# Altium PCB PCB1.PcbDoc (part 3 of 3)
Units mm, origin at the board's own origin, x right, y up, seen from the top; angles counter-clockwise.
Board outline 150.95 x 92.76 mm, 4 copper layers (Top Layer, GND, VCC, Bottom Layer); 250 components, 258 nets, 1099 pads, 538 vias.
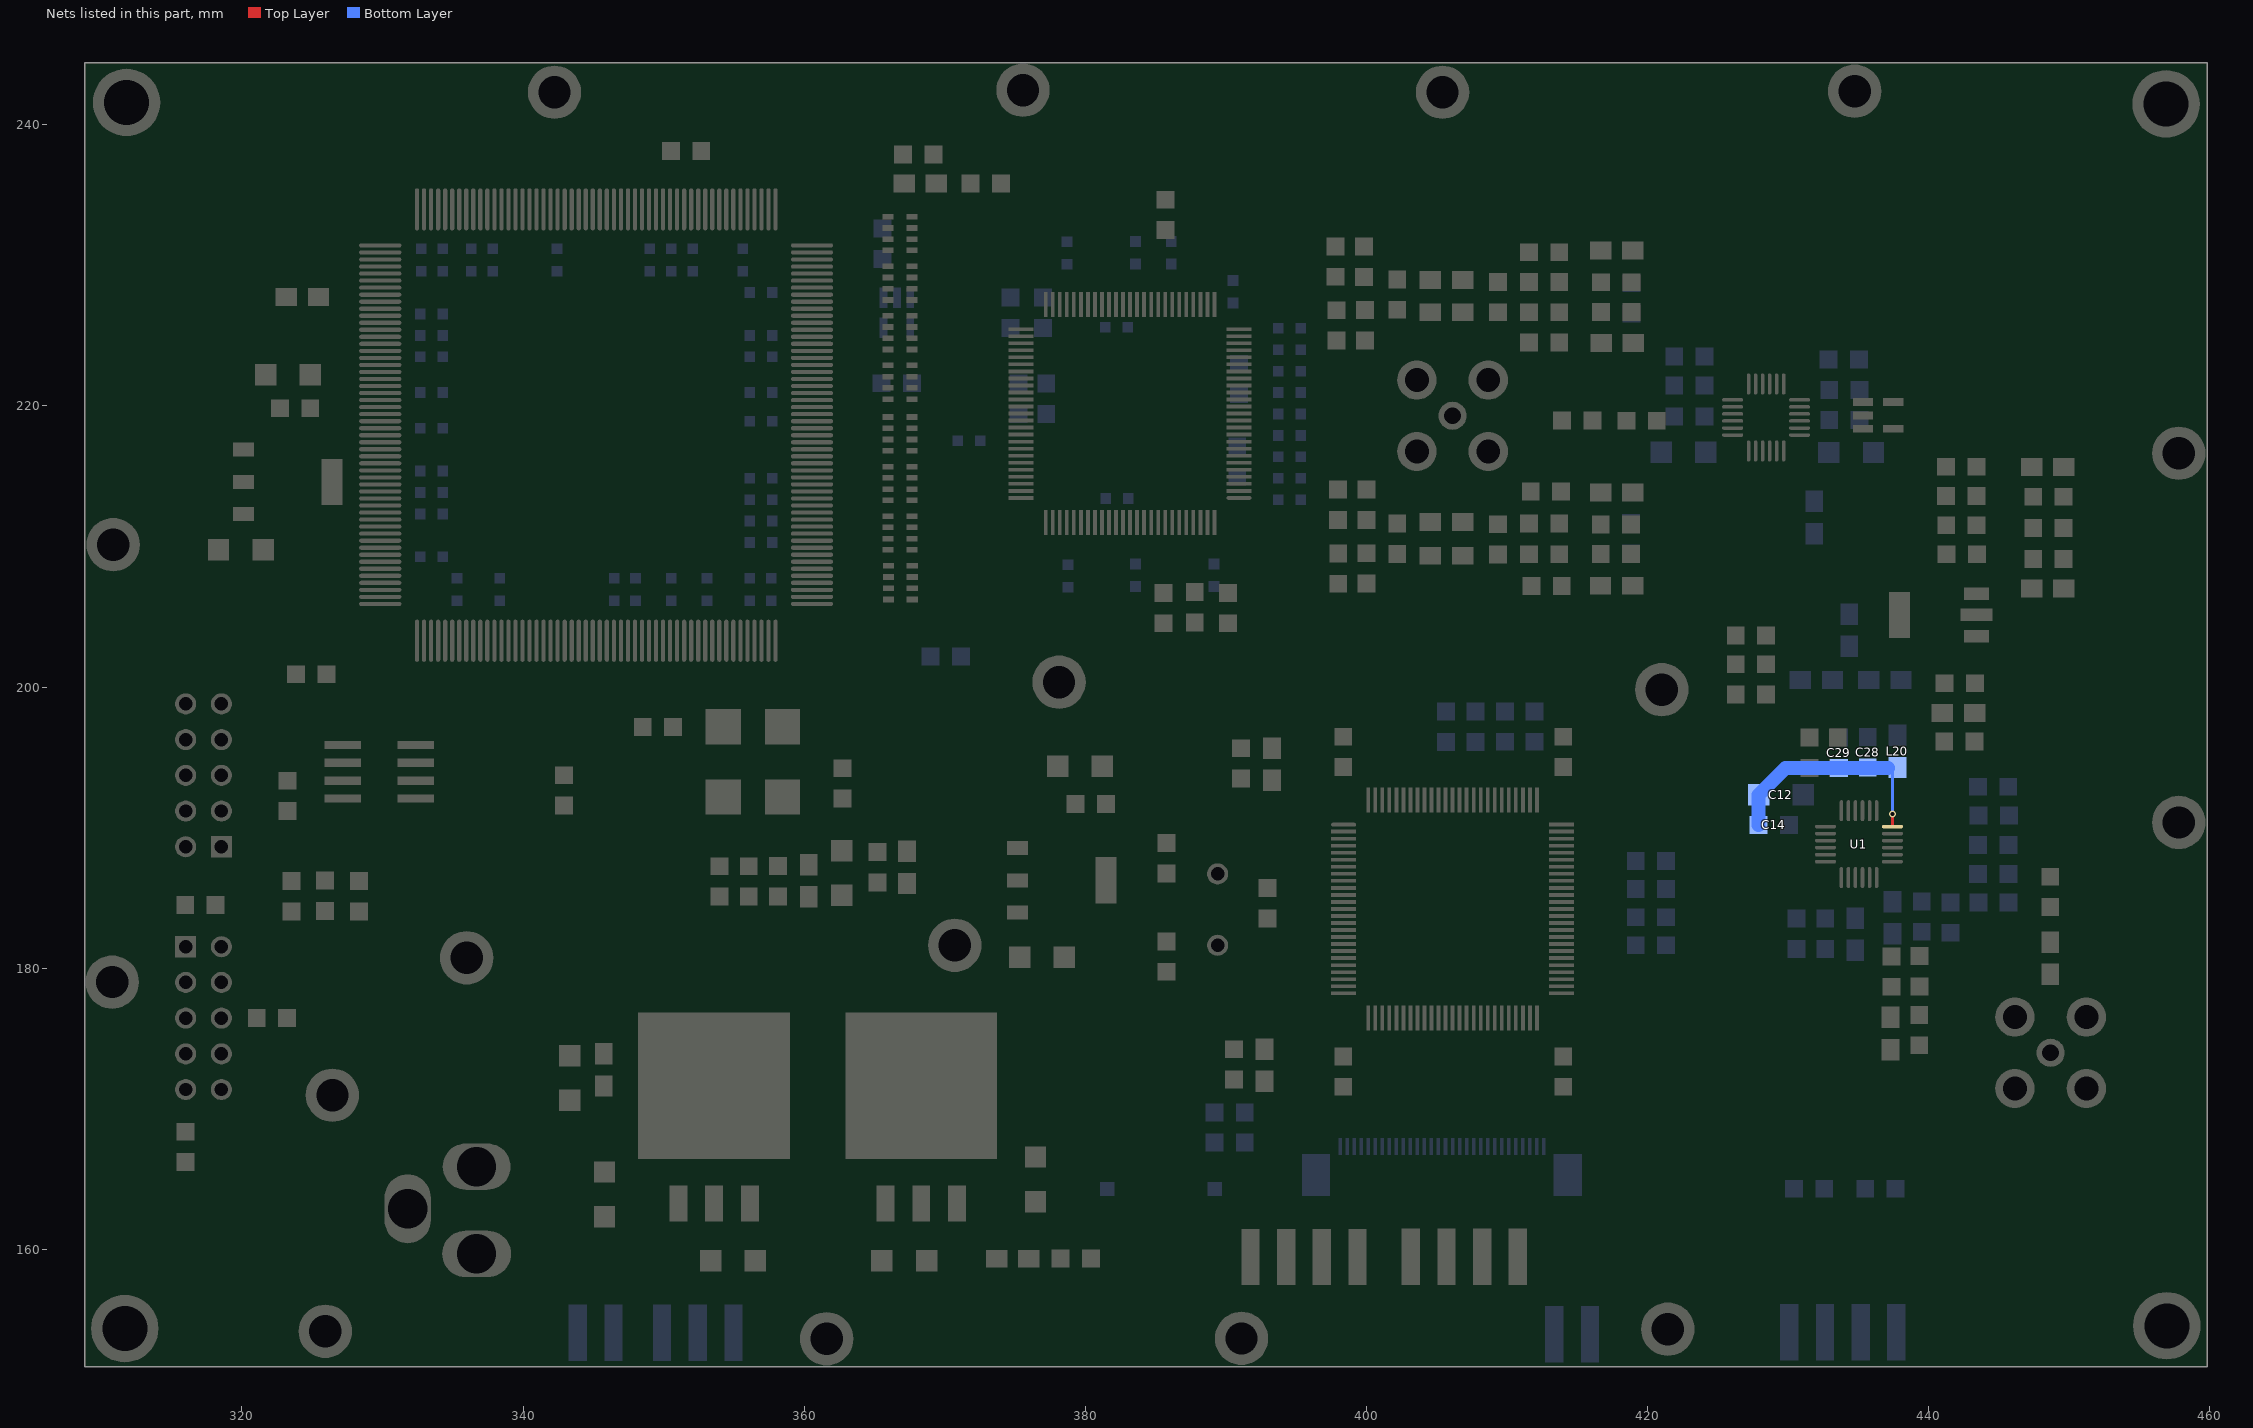
[diagram p5: the nets of this part, all layers, seen from the top]

## Via types
v1: diameter 0.5, hole 0.3, Top Layer to Bottom Layer, 224 vias
v2: diameter 1, hole 0.5, Top Layer to Bottom Layer, 206 vias
v3: diameter 0.508, hole 0.254, Top Layer to Bottom Layer, 97 vias
v4: diameter 0.5, hole 0.3, Top Layer to Bottom Layer, tented both sides, 7 vias
v5: diameter 2, hole 1, Top Layer to Bottom Layer, 4 vias

## Nets (pads, with @x,y where several pads share a name; then routed paths per layer and width w, separated by ;. In a path a pad name is that pad's centre, name@x,y a point inside that pad or via, vN(x,y) a via of type N, cw(c..) or ccw(c..) an arc to the next point about the centre after c; other vN are vias at no path point) (continued)
VVCO3_3_4360: C12.1 C14.1 C28.1 C29.1 L20.2 U1.6 | length 16.4
  Top Layer w0.203: U1.6@437.413,190.079 v1(437.413,190.983)
  Bottom Layer w0.203: 437.083,194.259 437.413,193.929 v1(437.413,190.983)
  Bottom Layer w1: C14.1@427.888,190.195 C12.1@427.888,192.329 429.819,194.259 C29.1@433.603,194.259 437.083,194.259
pads on no net: LL1.2 LL2.2 P2.6 P2.7 P2.8 P3.2 P10.0 U2.1 U2.6 U2.7 U2.13 U2.15 U4.3 U4.4 U4.5 U4.6 U4.8 U4.10 U4.11 U4.12 U4.14 U4.15 U4.24 U4.27 U4.30 U4.31 U4.33 U4.34 U4.35 U4.39 U4.40 U4.41 U4.43 U4.44 U4.45 U4.46 U4.48 U4.56 U4.81 U4.116 U4.118 U4.127 U4.128 U4.129 U4.130 U4.131 U4.132 U4.133 U4.134 U4.135 U4.137 U4.138 U4.139 U4.141 U4.142 U4.143 U4.144 U4.146 U4.147 U4.149 U4.150 U4.152 U4.160 U4.161 U4.162 U4.163 U4.164 U4.165 U4.168 U4.169 U4.171 U4.173 U4.175 U4.176 U4.179 U4.180 U4.181 U4.182 U4.185 U4.187 U4.188 U4.189 U4.191 U4.193 U4.195 U4.197 U4.198 U4.199 U4.200 U4.201 U4.203 U4.205 U4.206 U4.207 U4.208 U5.59 U5.60 U5.66 U5.94 U5.96 U7.73

## Polygon pours and split planes (outlines as drawn)
GND on Bottom Layer "Bottom Layer-No Net" (solid, remove dead copper, pour order 2): 333.426,230.556 356.972,230.556 356.972,206.781 356.921,206.731 333.477,206.731
GND on GND (split plane): 459.28,152.148 309.349,152.148 309.349,243.888 459.28,243.888

## Keep-outs
Keep-Out Layer:
  the board outline again, w0.508

## Other copper
Top Layer:
  rectangle net GND: 436.474,202.743 440.182,207.416
  rectangle net GND: 419.596,151.638 423.596,202.286
  rectangle net GND: 324.016,151.689 328.016,171.755
  region net GND: 326.819,169.015 337.931,180.128 335.102,182.956 323.99,171.843
  rectangle net GND: 308.839,151.638 312.839,244.399
  rectangle net GND: 455.791,151.638 459.791,244.399
  rectangle net GND: 369.367,198.311 423.52,202.311
  rectangle net GND: 335.026,178.931 373.253,182.931
  rectangle net GND: 369.278,178.918 373.278,202.286
  rectangle net GND: 308.839,151.638 459.791,155.638
  rectangle net GND: 308.839,240.399 459.791,244.399
  rectangle net VCC3_3: 376.58,169.596 383.413,176.149
  rectangle net 5VCC: 358.445,160.122 363.398,164.668
  rectangle net GND: 378.739,214.732 388.01,224.003
  rectangle net GND: 337.541,211.734 352.628,225.654
  rectangle net GND: 433.883,187.655 436.245,190.068
  rectangle net GND: 427.279,217.983 429.641,220.396
VCC:
  rectangle net VCC3_3: 376.58,169.494 383.413,176.149
  rectangle net 5VCC: 358.445,160.122 363.398,164.668

## Silkscreen, mask and mechanical layers (free items; w line width, h text height)
Top Solder:
  rectangle: 436.474,202.743 440.182,207.416
  rectangle: 419.596,151.638 423.596,202.286
  rectangle: 324.016,151.689 328.016,171.755
  region: 326.819,169.015 337.931,180.128 335.102,182.956 323.99,171.843
  rectangle: 308.839,151.638 312.839,244.399
  rectangle: 455.791,151.638 459.791,244.399
  rectangle: 369.367,198.311 423.52,202.311
  rectangle: 335.026,178.931 373.253,182.931
  rectangle: 369.278,178.918 373.278,202.286
  rectangle: 308.839,151.638 459.791,155.638
  rectangle: 308.839,240.399 459.791,244.399
  rectangle: 433.883,187.655 436.245,190.068
  rectangle: 427.279,217.983 429.641,220.396
  rectangle: 378.739,214.732 388.01,224.003
  rectangle: 337.541,211.734 352.628,225.654
  lines w1.5: 312.109,158.577 ccw(c315.859,158.577) 315.859,154.827 ; 312.129,237.429 cw(c315.879,237.429) 315.879,241.179 ; 320.975,154.909 ccw(c320.975,158.659) 324.725,158.659 ; 327.324,158.679 ccw(c331.074,158.679) 331.074,154.928 ; 327.431,169.291 cw(c331.165,168.936) 328.459,171.532 ; 335.195,178.251 cw(c338.099,175.879) 338.635,179.59 ; 366.263,182.239 ccw(c366.263,185.989) 370.013,185.989 ; 372.526,195.335 cw(c376.276,195.335) 376.276,199.085 ; 416.55,199.046 cw(c416.55,195.296) 420.3,195.296 ; 416.606,154.883 ccw(c416.606,158.633) 420.356,158.633 ; 422.802,158.653 ccw(c426.552,158.653) 426.552,154.903 ; 452.725,154.934 ccw(c452.725,158.684) 456.475,158.684 ; 452.745,241.058 cw(c452.745,237.307) 456.495,237.307

## Text inside footprints (layer, text, board x,y; h text height)
U5: Top Overlay "*" at 391.262,213.157 h0.8 r180
U7: Top Overlay "*" at 398.043,190.525 h0.8